# Altium PCB ExamplePCB.PcbDoc
Units mm, origin at the board's own origin, x right, y up, seen from the top; angles counter-clockwise.
Board outline 68 x 61 mm, 2 copper layers (Top Layer, Bottom Layer); 11 components, 12 nets, 35 pads, 0 vias.
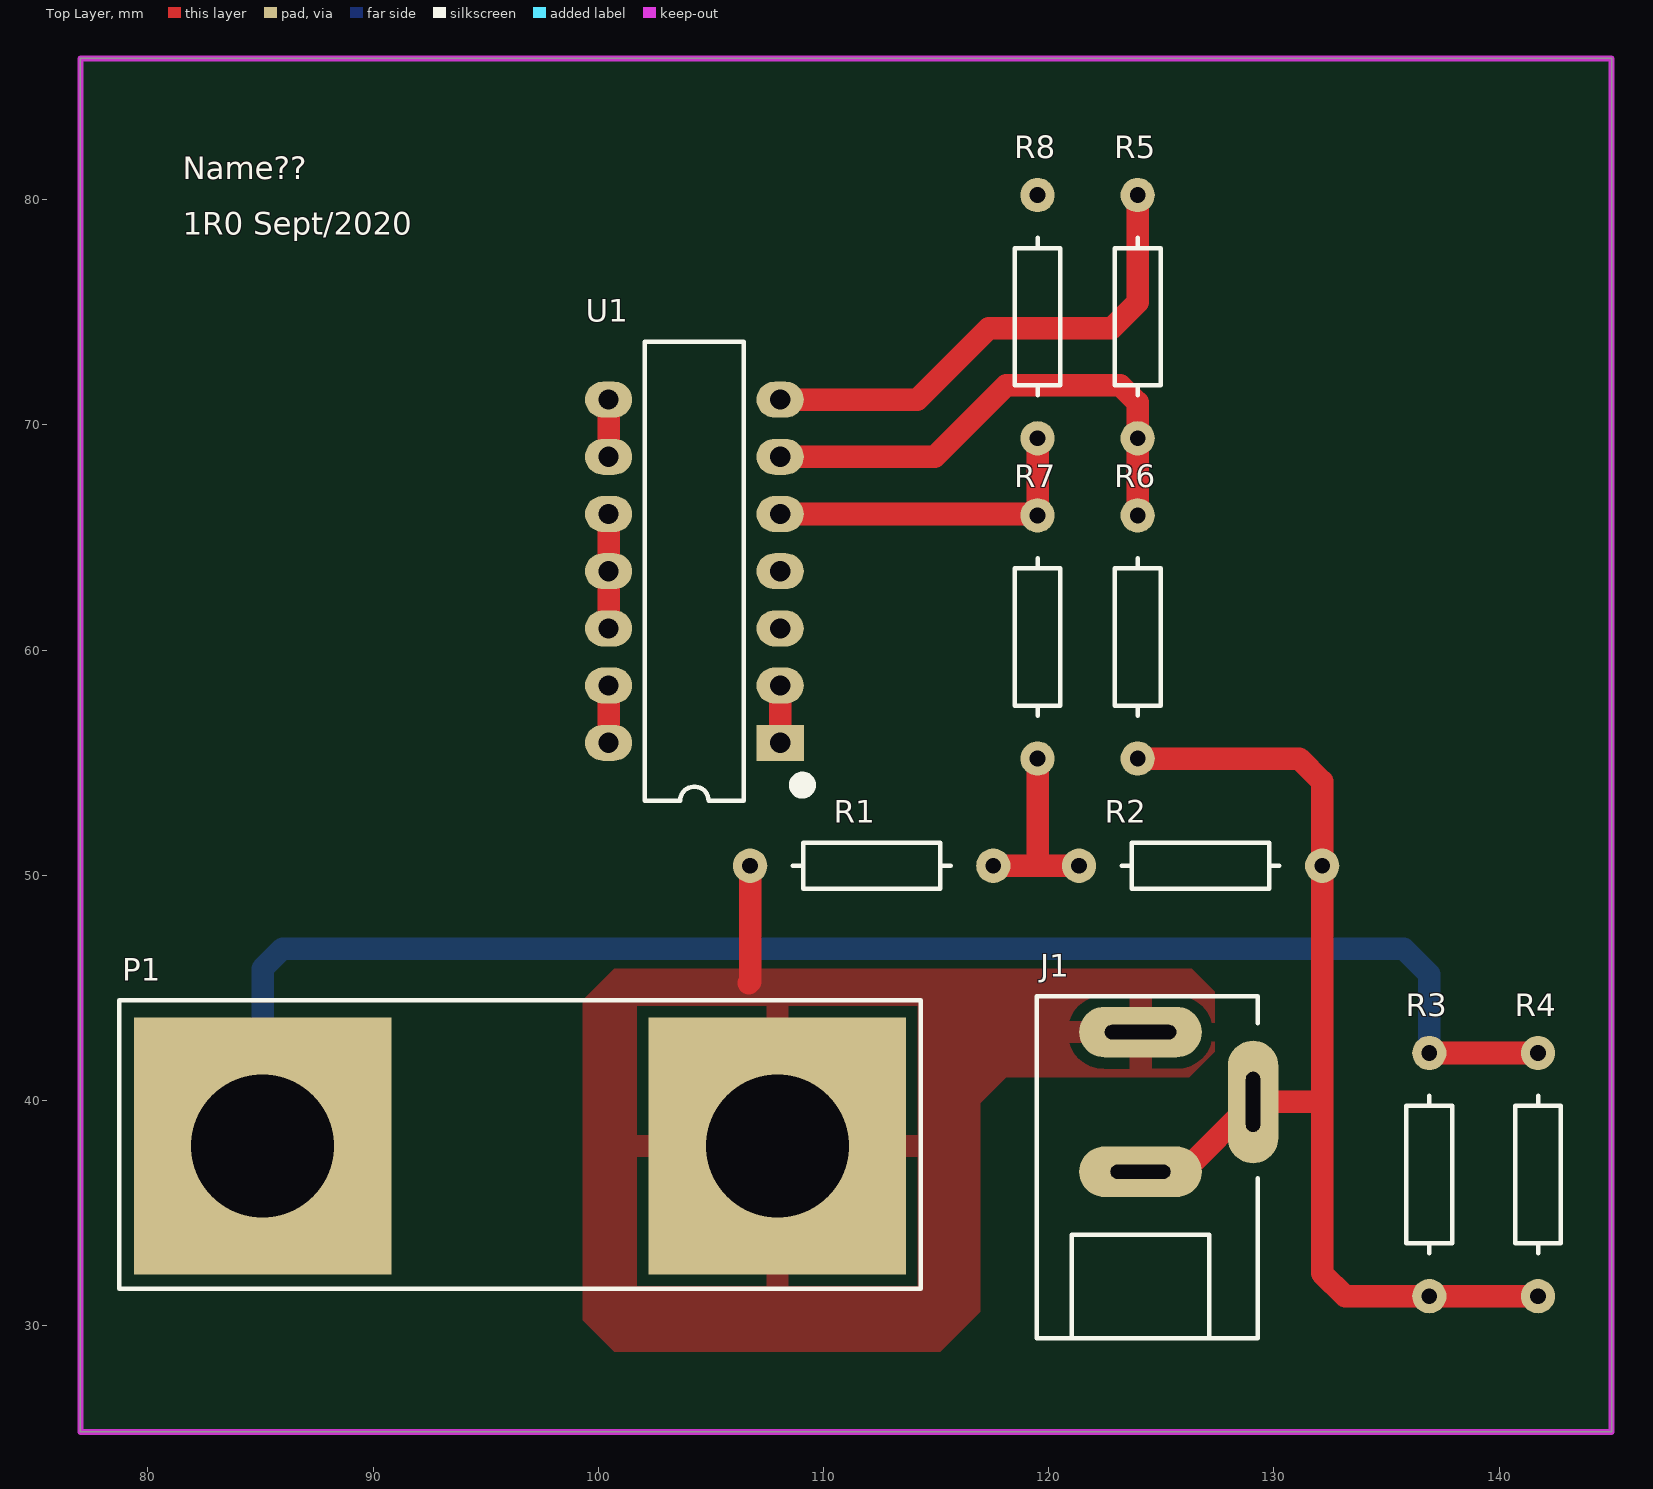
[diagram p0: Top Layer view]
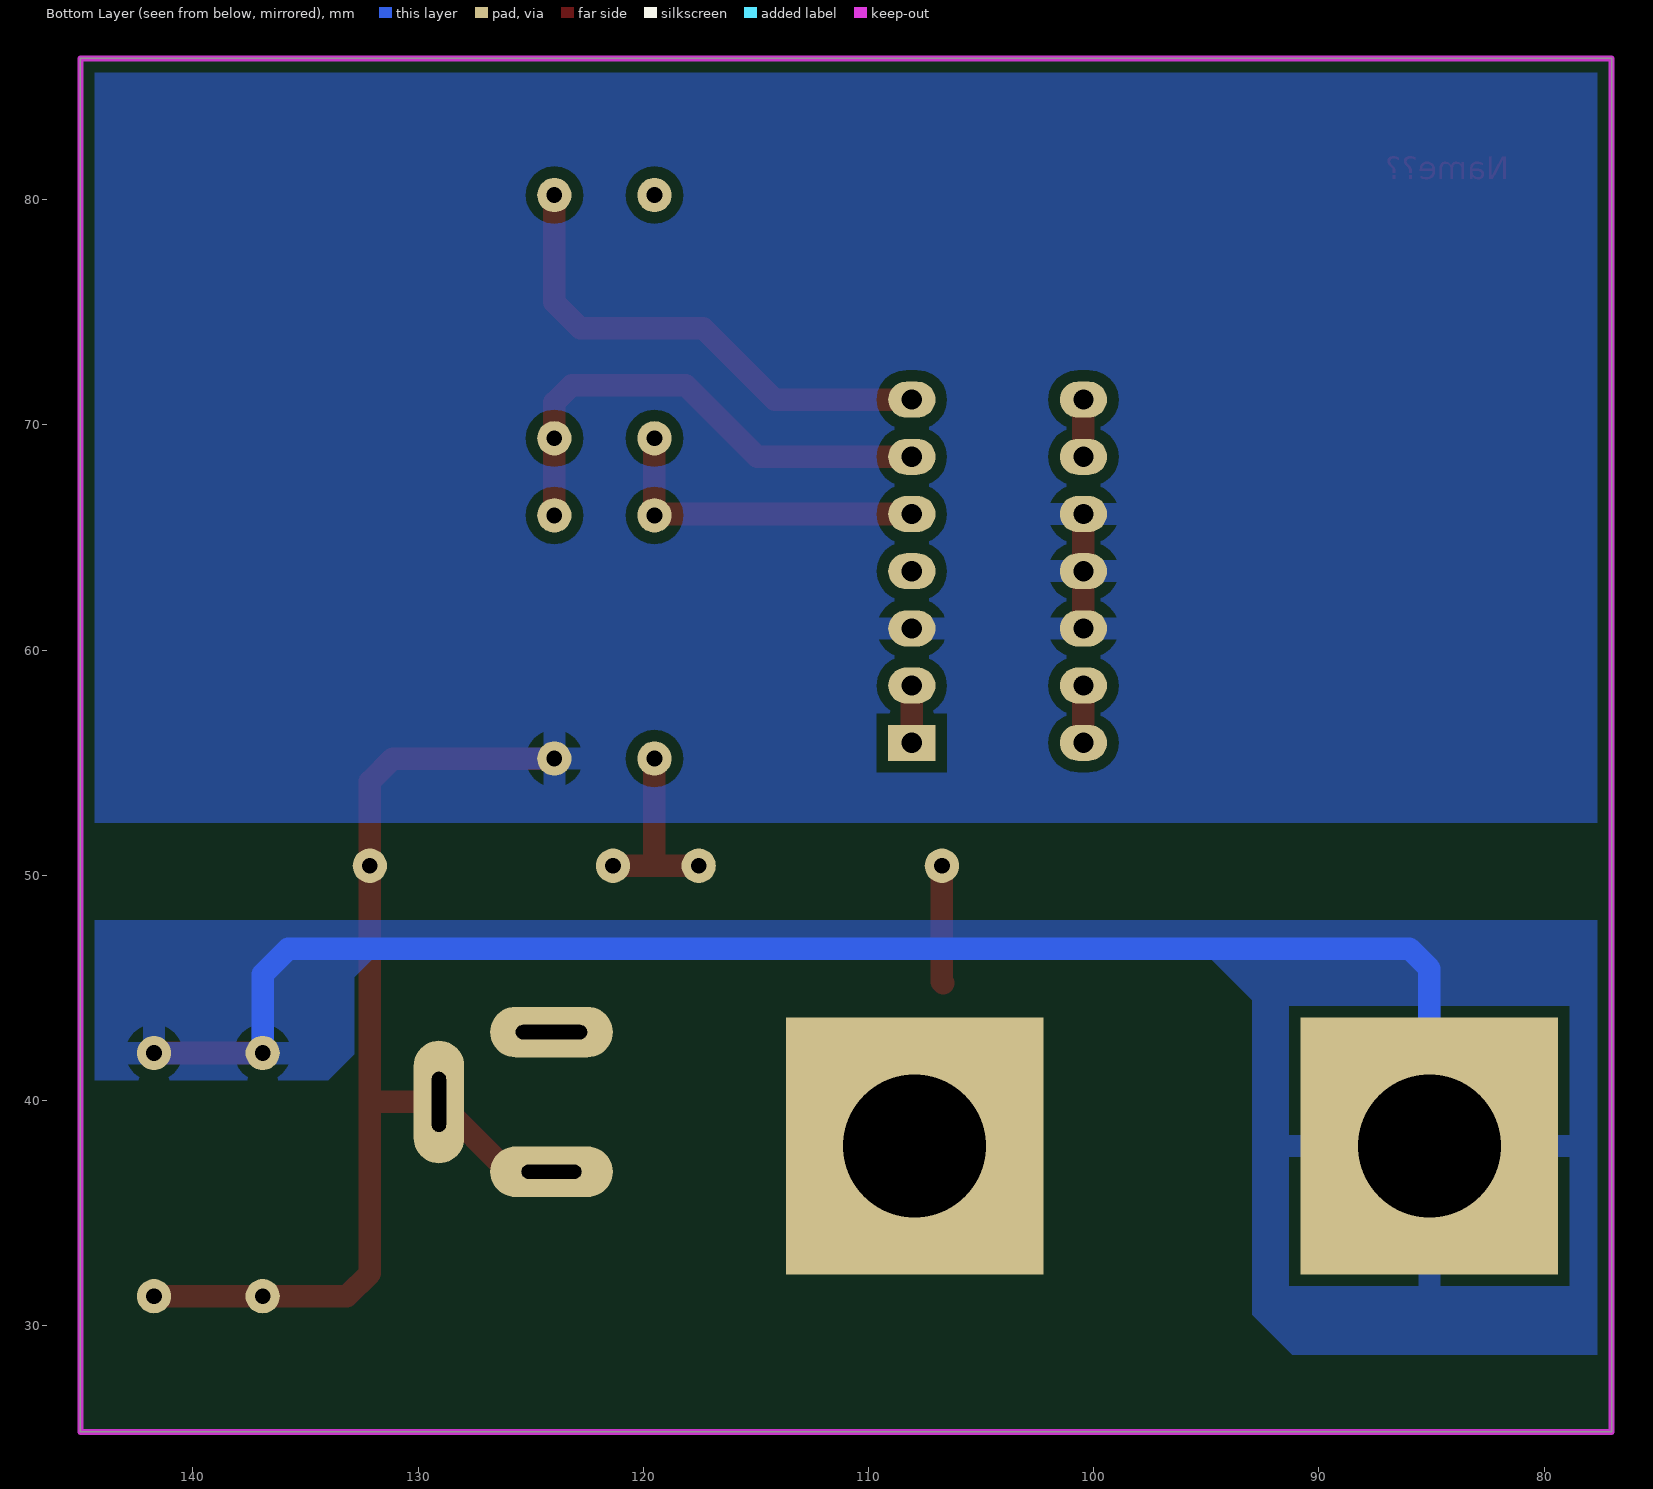
[diagram p1: Bottom Layer view, seen from below]
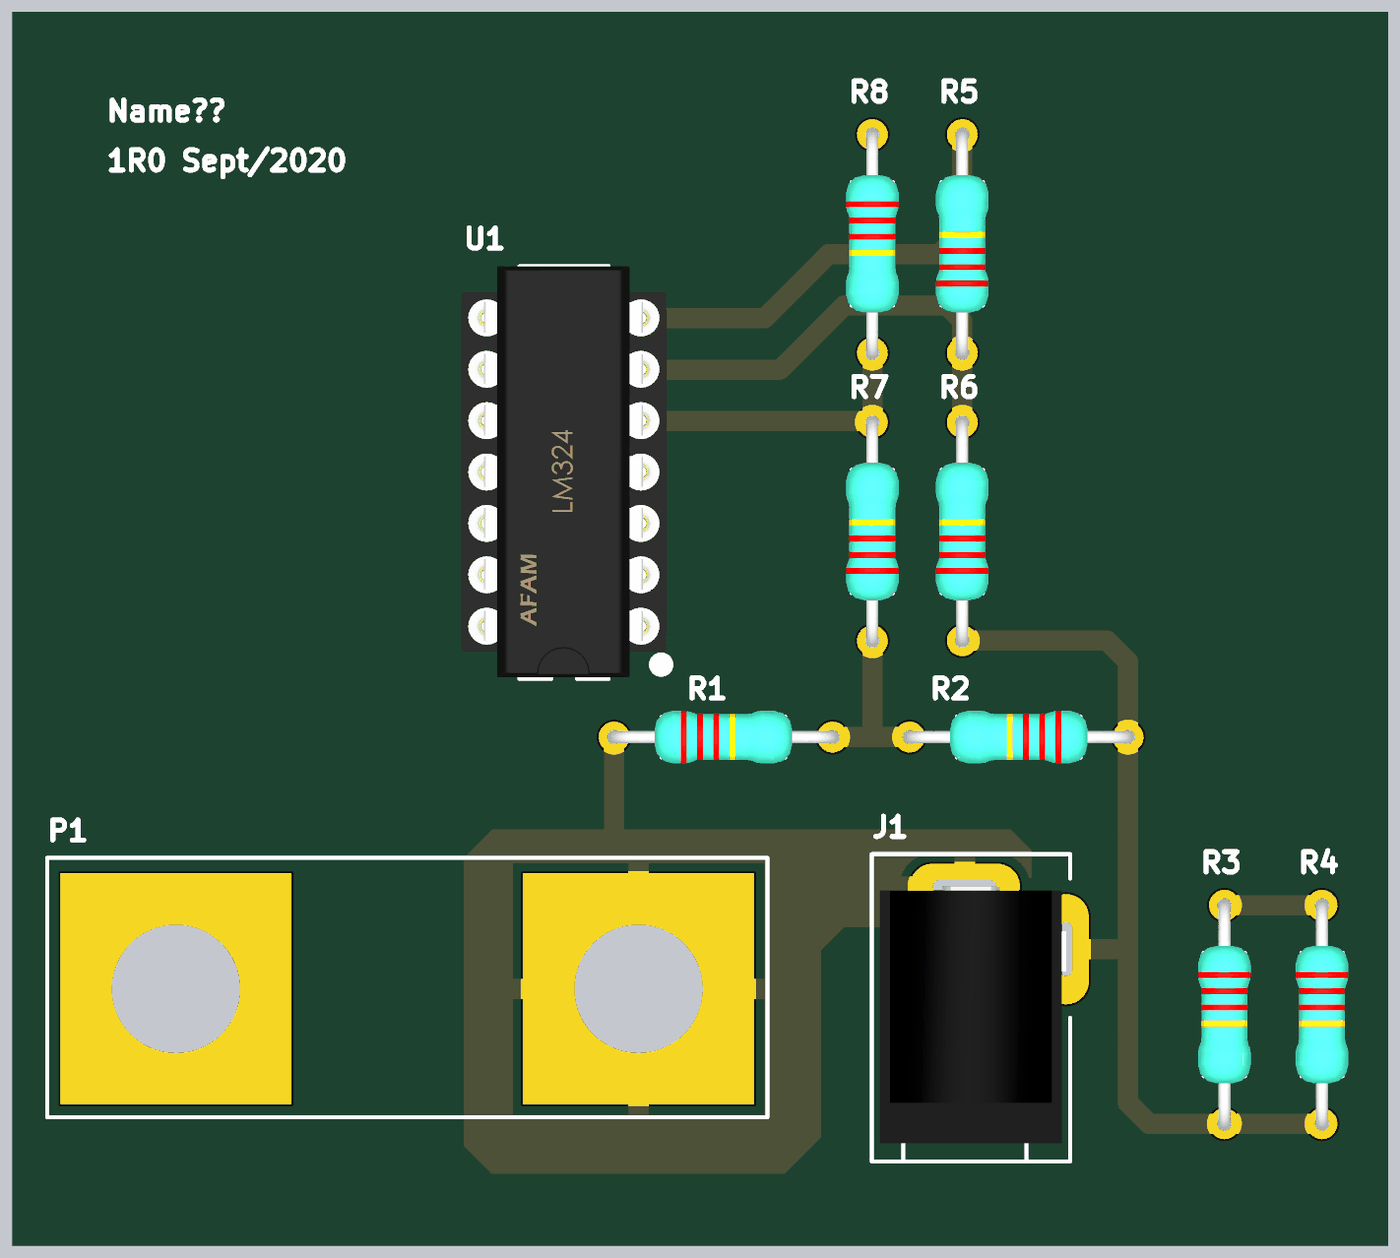
[diagram p2: 3D render of the assembled board from above, using the file's embedded part models]

## Layer stack, top to bottom
Top Solder: solder mask 0.0102, Solder Resist, Dk 3.5
Top Layer: signal copper 0.0356
Dielectric 1: dielectric 0.32, FR-4, Dk 4.8
Bottom Layer: signal copper 0.0356
Bottom Solder: solder mask 0.0102, Solder Resist, Dk 3.5

## Board outline
77,25.273 77,86.273 145,86.273 145,25.273

## Design rules (kind name [scope] priority, off if disabled: settings)
Clearance [All] p1: gap=0.5 ignorepadtopadclearanceinfootprint=FALSE
Height [All] p1: minheight=0 maxheight=100 prefheight=12.7
HoleSize [All] p1: absolutevalues=TRUE maxlimit=10 minlimit=0.5 maxpercent=80.000 minpercent=20.000
PolygonConnect [All] p1: connectstyle=Relief reliefconductorwidth=1 reliefentries=4 polygonreliefangle="90 Angle" airgapwidth=0.5
RoutingVias [All] p1: holewidth=0.711 width=1.27 viastyle="Through Hole" minholewidth=0.711 minwidth=1.27 maxholewidth=0.711 maxwidth=1.27
SilkToSilkClearance [All] p1: silktosilkclearance=0.1
SilkToSolderMaskClearance [IsPad] p1: minsilkscreentomaskgap=0.1 clearancetoexposedcopper=TRUE
SolderMaskExpansion [All] p1: expansion=0.102 istentingtop=FALSE
Width [All] p1: maxlimit=10 minlimit=0.5 preferedwidth=1
26 further rules are at their usual default settings.

## Components (designator, comment, footprint, x,y, rotation, side; value= is the part's Value field where it differs from the comment)
J1 "DC barrel jack" AC-Socket 124.079,37.03 r90 top value=socket
P1 "Dual Banana Plugs" "Dual Banana Plug" 96.52,37.973 r180 top
R1 "100k" AXIAL-0.4 112.141,50.419 r0 top
R2 "10k" AXIAL-0.4 126.746,50.419 r180 top
R3 "1R0" AXIAL-0.4 136.906,36.703 r270 top
R4 "1R0" AXIAL-0.4 141.732,36.703 r270 top
R5 "1k" AXIAL-0.4 123.952,74.803 r90 top
R6 "1k" AXIAL-0.4 123.952,60.579 r90 top
R7 "1k" AXIAL-0.4 119.507,60.579 r90 top
R8 "1k" AXIAL-0.4 119.507,74.803 r270 top
U1 "LM324" DIP-14 104.267,63.5 r180 top

## Footprints (in the part's own frame and the unit in brackets; to place one, negate y for a bottom-side part, rotate by r counter-clockwise, add the part's x,y. Pads: shape width x height; smd on the part's side, far side on the other; paste and mask are expansions set on the pad)
AC-Socket [mm]
  oval 2.25x5.45 hole 0.635 slot 3.175 at 90 deg: 1(6,0)
  oval 5.45x2.25 hole 0.635 slot 2.667 at 0 deg: 2(2.9,-5)
  oval 2.25x5.45 hole 0.635 slot 2.667 at 90 deg: 3(-0.2,0)
  silkscreen extent -7.6,-5.2 7.6,4.6, body extent -6.7,-5 6,4.2, height 10.5
AXIAL-0.4 [mm]
  round 1.524 hole 0.7: 1(-5.4,0) 2(5.4,0)
  silkscreen extent -3.5,-1.02 3.5,1.02, body extent -5.7,-1.3 5.7,1.3, height 2.7
DIP-14 [mm] "DIP; 14 Leads; Row Spacing 7.62 mm; Pitch 2.54 mm"
  rect 2.1x1.6 hole 0.9: 1(-3.81,7.62)
  oval 2.1x1.6 hole 0.9: 2(-3.81,5.08) 3(-3.81,2.54) 4(-3.81,0) 5(-3.81,-2.54) 6(-3.81,-5.08) 7(-3.81,-7.62) 8(3.81,-7.62) 9(3.81,-5.08) 10(3.81,-2.54) 11(3.81,0) 12(3.81,2.54) 13(3.81,5.08) 14(3.81,7.62)
  silkscreen extent -5.1,-10.2 2.2,10.2, body extent -5.07,-10.2 5.09,10.12, height 9.47
"Dual Banana Plug" [mm] "Connector; 2 Position"
  rect 11.43x11.43 hole 6.35: 1(-11.43,0) 2(11.43,0)
  silkscreen extent -17.8,-6.48 17.8,6.35, body extent -17.38,-5.99 17.43,5.99, height 5.5

## Part data
J1: library part AC_Input, "DC barrel jack connection to AC source"
P1: library part AC_Output, "Dual banana plugs connection to the AC load", LatestRevisionDate=17-Jul-2002, LatestRevisionNote="Re-released for DXP Platform.", Publisher="Altium Limited"
R1 R2 R3 R4 R5 R6 R7 R8: library part Res_TH_0AX4, "Through hole resistor", ComponentLink1Description=http://www.royalohm.com/pdf/product2017/PrecisionMetalMF.pdf, LatestRevisionDate=17-Jul-2002, LatestRevisionNote="Re-released for DXP Platform.", PackageReference=AXIAL-0.4, Published=8-Jun-2000, Publisher="Altium Limited"
U1: library part LM324N_TH_DIP16, "IC OPAMP GP 14DIP", Current - Supply=1mA, Manufacturer="ON Semiconductor", Manufacturer Part Number=LM324N, Operating Temperature="0°C ~ 70°C", Package / Case="14-DIP (0.300\", 7.62mm)", Supplier Device Package=14-DIP, Supplier Part Number 1=LM324NFS-ND, Voltage - Supply, Single/Dual (±)="3 V ~ 32 V, ±1.5 V ~ 16 V", Amplifier Type="General Purpose", Base Part Number=LM324, Category="Integrated Circuits (ICs)", ComponentLink1Description=https://www.fairchildsemi.com/datasheets/LM/LM2902.pdf, ComponentLink1URL=https://www.fairchildsemi.com/datasheets/LM/LM2902.pdf, Mounting Type="Through Hole", Output Type=-, Packaging=Tube, Part Status=Active, Pricing 1="1=0.9, 10=0.775, 100=0.5789, 500=0.45482, 1000=0.35145 (NZD)", RoHS="RoHS Compliant", Slew Rate=-, Stock 1=2900, Supplier 1=Digi-Key

## Nets (pads, with @x,y where several pads share a name; then routed paths per layer and width w, separated by ;. In a path a pad name is that pad's centre, name@x,y a point inside that pad or via, vN(x,y) a via of type N, cw(c..) or ccw(c..) an arc to the next point about the centre after c; other vN are vias at no path point)
2V1: R8.1
5V: U1.4
GND: J1.2 J1.3 R2.1 R3.2 R4.2 R6.1 U1.3 U1.10 U1.11 U1.12 | length 54.9
  Top Layer w1: U1.12 U1.11 U1.10 ; R6.1 131.13,55.179 132.146,54.163 R2.1 132.146,39.878 ; J1.3 125.979,36.83 J1.2 132.094,39.93 132.146,39.878 ; R4.2 R3.2 133.162,31.303 132.146,32.319 132.146,39.878
NetR5_1: R5.1 R6.2 U1.6 | length 22.5
  Top Layer w1: U1.6 114.935,68.58 118.11,71.755 123.19,71.755 123.952,70.993 R5.1 R6.2
NetR5_2: R5.2 U1.7 | length 22.4
  Top Layer w1: U1.7 114.173,71.12 117.348,74.295 122.809,74.295 123.952,75.438 R5.2
NetR7_2: R7.2 R8.2 U1.5 | length 14.7
  Top Layer w1: U1.5 119.446,66.04 R7.2 R8.2@119.507,69.215
NetU1_1: U1.1 U1.2 | length 2.5
  Top Layer w1: U1.1 U1.2
NetU1_8: U1.8 U1.9 | length 2.5
  Top Layer w1: U1.9 U1.8
NetU1_13: U1.13 U1.14 | length 2.5
  Top Layer w1: U1.14 U1.13
VAC: J1.1 P1.1 R1.1 | length 6.9
  Top Layer w1: 106.68,45.212 106.741,45.273 R1.1 ; P1.1@106.741,39.182 P1.1
Vis: P1.2 R3.1 R4.1 | length 68.8
  Top Layer w1: R3.1 R4.1
  Bottom Layer w1: P1.2 85.09,45.847 85.979,46.736 135.763,46.736 136.906,45.593 R3.1
Vvs: R1.2 R2.2 R7.1 | length 8.6
  Top Layer w1: R1.2 119.443,50.419 ; R7.1 119.507,50.483 119.443,50.419 ; R2.2 119.443,50.419

## Polygon pours and split planes (outlines as drawn)
Vis on Bottom Layer "VIS_L02_P003" (solid, pour order 3): 134.874,40.894 133.985,40.894 132.842,42.037 132.842,45.466 131.826,46.482 94.996,46.482 92.964,44.45 92.964,30.48 91.186,28.702 76.962,28.702 76.962,48.006 144.907,48.006 144.907,41.021 145.034,40.894
GND on Bottom Layer "GND_L02_P000" (solid, pour order 0): 77,86.273 145,86.273 145,52.324 77,52.324
VAC on Top Layer "VAC_L01_P002" (solid, pour order 2): 127.381,42.164 127.381,44.831 126.365,45.847 100.711,45.847 99.314,44.45 99.314,30.226 100.711,28.829 115.189,28.829 116.967,30.607 116.967,39.878 118.11,41.021 126.238,41.021

## Keep-outs
Keep-Out Layer:
  the board outline again, w0.254

## Other copper
Top Layer:
  text "Name??" at 81.534,80.899 h1

## Silkscreen, mask and mechanical layers (free items; w line width, h text height)
Top Overlay:
  text "Name??" at 81.534,80.899 h1
  text "1R0 Sept/2020" at 81.534,78.438 h1